# Altium PCB Lab7PCB.PcbDoc
Units mil, origin at the board's own origin, x right, y up, seen from the top; angles counter-clockwise.
Board outline 6000 x 4000 mil, 2 copper layers (Top Layer, Bottom Layer); 23 components, 17 nets, 51 pads, 0 vias.
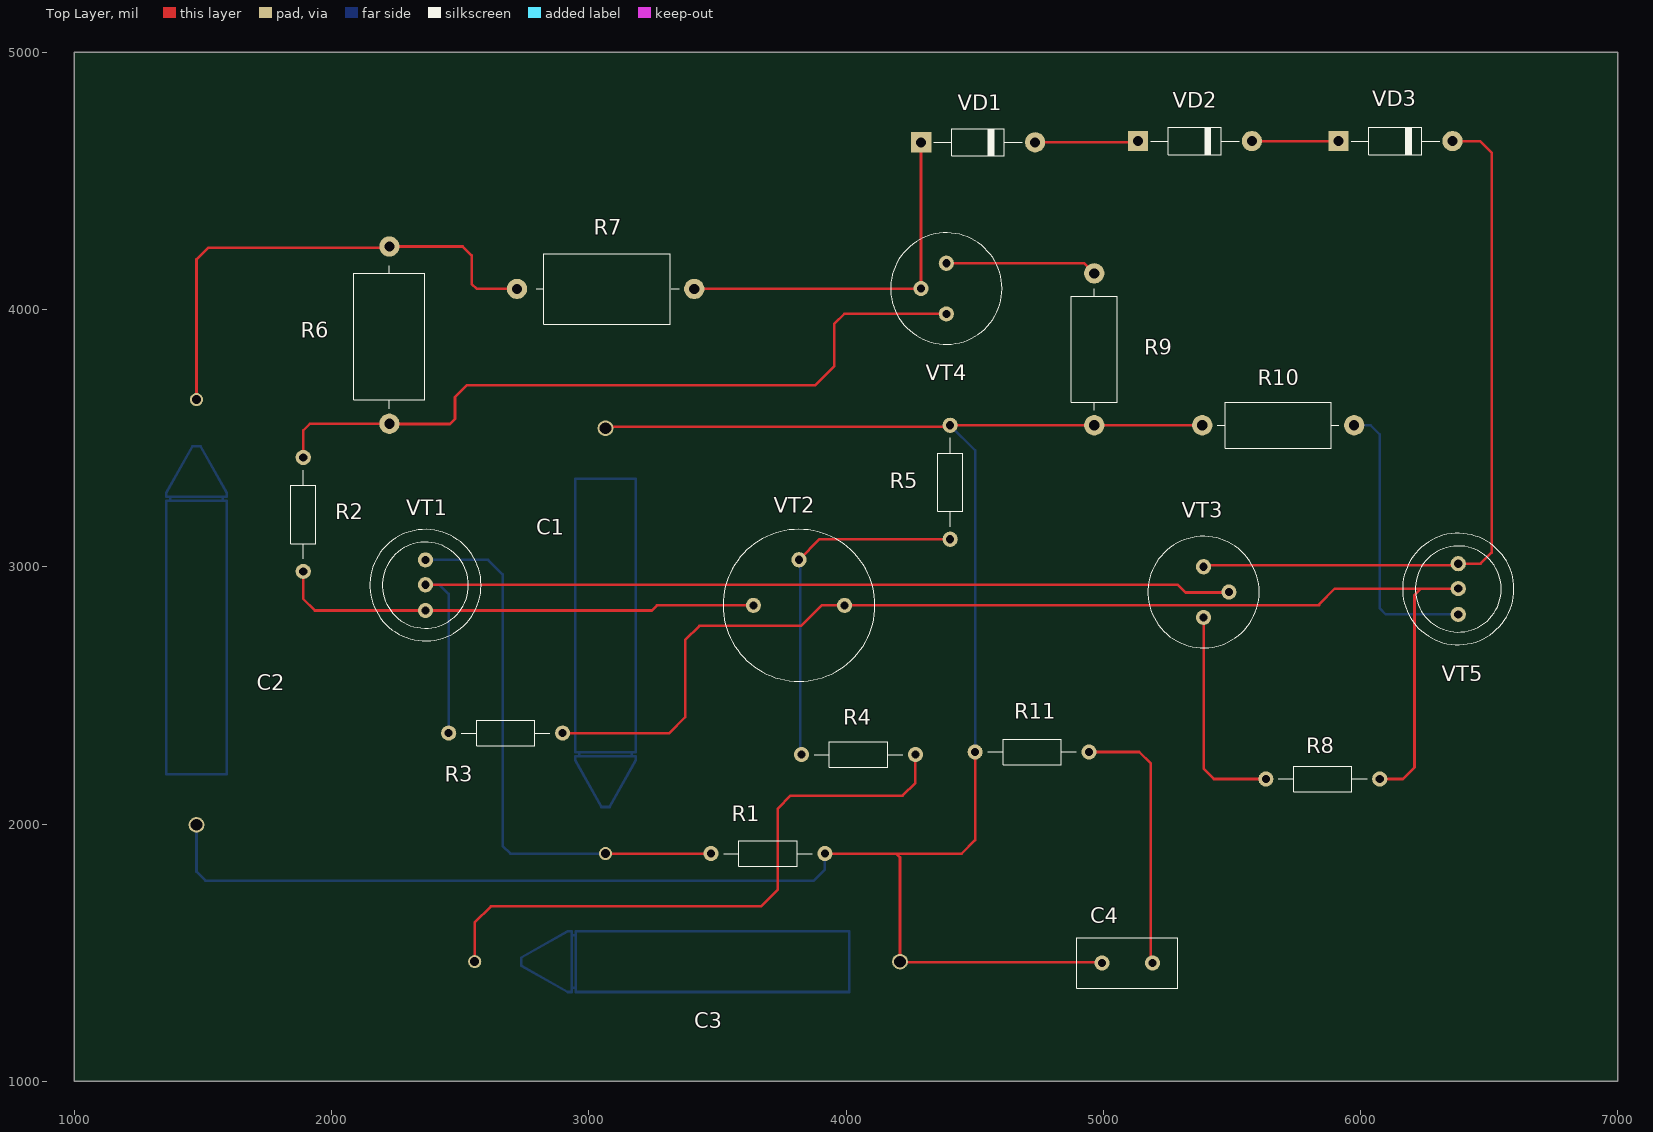
[diagram p0: Top Layer view]
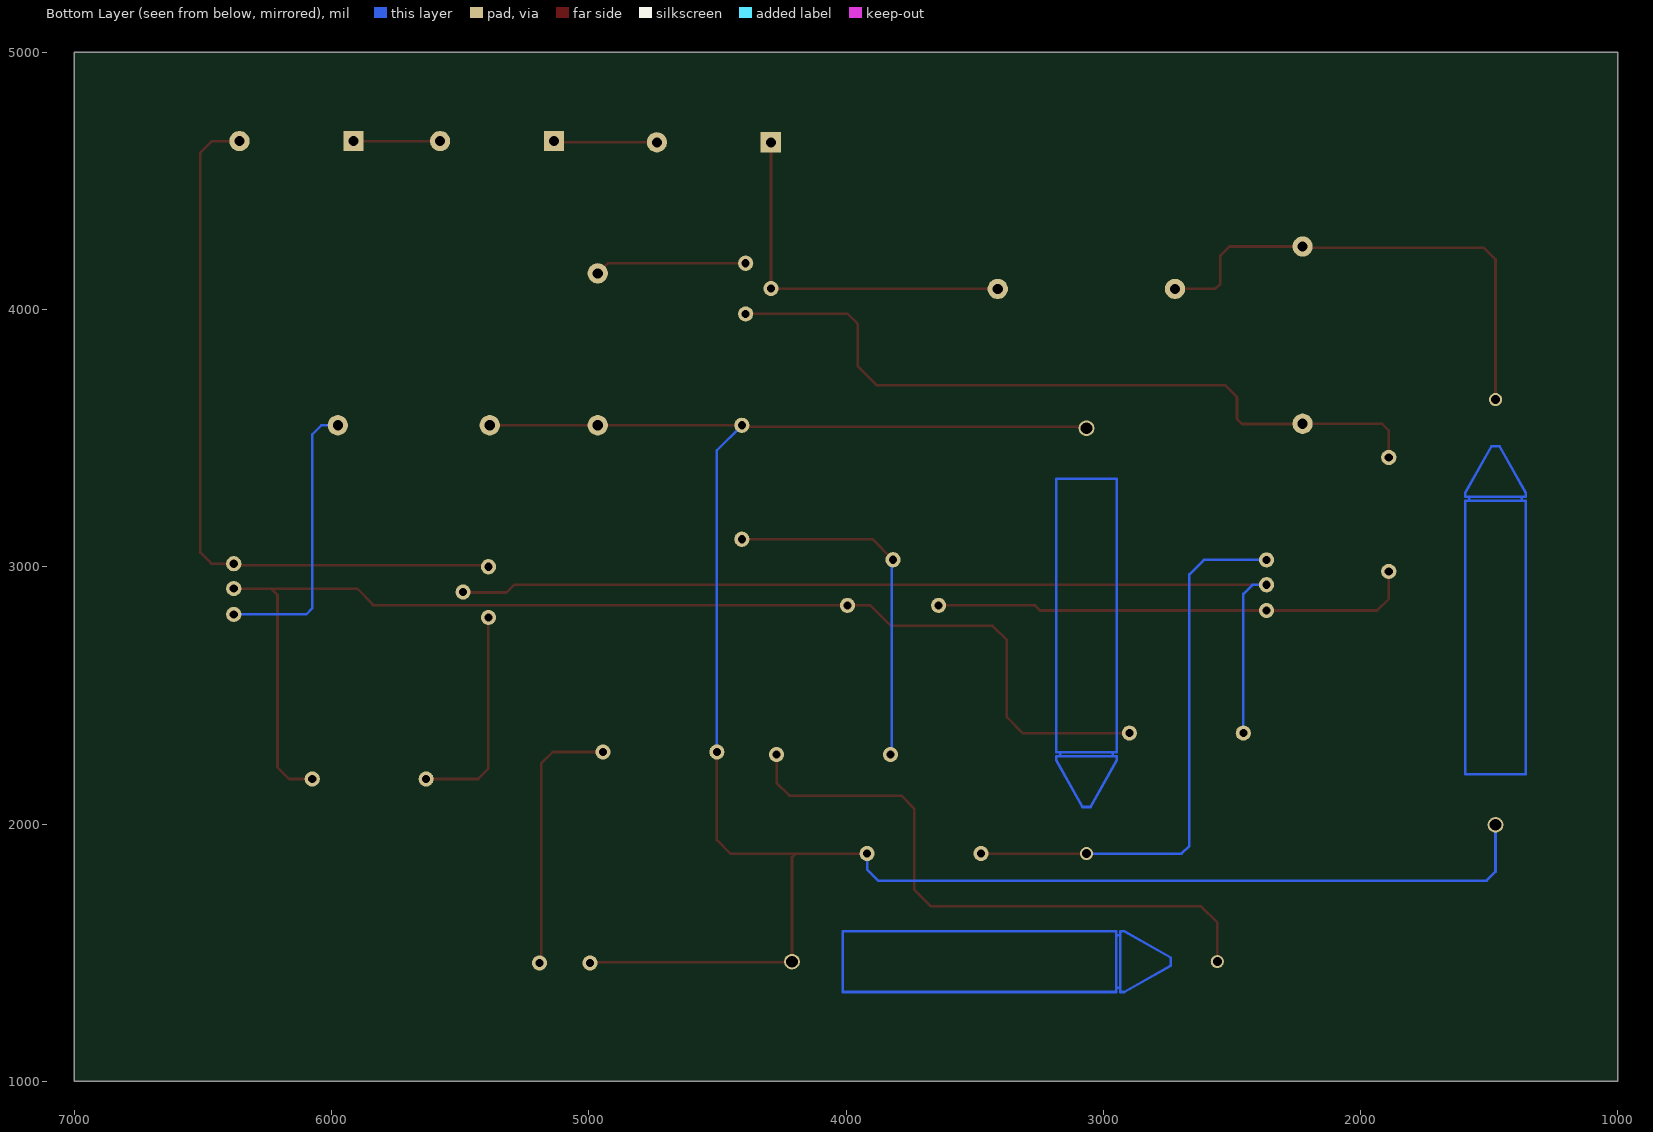
[diagram p1: Bottom Layer view, seen from below]

## Layer stack, top to bottom
Top Solder: solder mask 0.4, Solder Resist, Dk 3.5
Top Layer: signal copper 1.4
Dielectric 1: dielectric 12.6, FR-4, Dk 4.8
Bottom Layer: signal copper 1.4
Bottom Solder: solder mask 0.4, Solder Resist, Dk 3.5

## Board outline
1000,1000 7000,1000 7000,5000 1000,5000

## Design rules (kind name [scope] priority, off if disabled: settings)
Clearance [All] p1: gap=10 ignorepadtopadclearanceinfootprint=FALSE
PolygonConnect [All] p1: connectstyle=Relief reliefconductorwidth=10 reliefentries=4 polygonreliefangle="90 Angle" airgapwidth=10
RoutingVias [All] p1: holewidth=28 width=50 viastyle="Through Hole" minholewidth=28 minwidth=50 maxholewidth=28 maxwidth=50
SolderMaskExpansion [All] p1: expansion=4 istentingtop=FALSE
SupplyNets "Schematic Supply Nets_2" [InNet('+45')] p1: voltage=0.000
SupplyNets "Schematic Supply Nets_1" [InNet('-45')] p2: voltage=0.000
SupplyNets "Schematic Supply Nets" [InNet('GND')] p3: voltage=0.000
Width [All] p1: maxlimit=10 minlimit=10 preferedwidth=10
30 further rules are at their usual default settings.

## Classes and differential pairs
component class Sheet1: C1 C3 C4 R1 R2 R3 R4 R5 R6 R7 R8 R9 R10 R11 VD1 VD2 VD3 VT1 VT3 VT4 VT5

## Components (designator, comment, footprint, x,y, rotation, side; value= is the part's Value field where it differs from the comment)
C1 "10mkFx25B" K50_29 3065,3538.54 r270 top
C2 "10mkFx63B" K50_29 1475,1996.46 r90 top
C3 "K50_29" K50_29 4210,1465 r180 top
C4 "0,1" �10-17�-4 5191.85,1460 r180 top
R1 "27k" C2-33H-0.125W 3475,1885 r0 top
R2 "22k" C2-33H-0.125W 1890,3425 r270 top
R3 "1,5k" C2-33H-0.125W 2455.45,2353.36 r0 top
R4 "220" C2-33H-0.125W 4270,2270 r180 top
R5 "22k" C2-33H-0.125W 4405,3107.09 r90 top
R6 "3,3k" C2-33H-1W_17.5MM 2225,4245 r270 top
R7 "3,3k" C2-33H-1W_17.5MM 2721.02,4080 r0 top
R8 "33" C2-33H-0.125W 5632.09,2175 r0 top
R9 "0,33" C2-33H-0.5W_15MM 4965,4140.55 r270 top
R10 "0,33" C2-33H-0.5W_15MM 5385,3550 r0 top
R11 "10" C2-33H-0.125W 4502.09,2280 r0 top
VD1 "1N4007" DO-41(DO-204AL)_1N4007(Primary) 4292.09,4650 r180 top
VD2 "1N4007" DO-41(DO-204AL)_1N4007(Primary) 5135,4655 r180 top
VD3 "1N4007" DO-41(DO-204AL)_1N4007(Primary) 5915,4655 r180 top
VT1 "BC558" ��320� 2365,2830 r180 top
VT2 "BC558" 2T602A 3817.17,3027.17 r90 top
VT3 "TIP41" ��101 5390,2803.15 r180 top
VT4 "TIP142" ��101 4390,4180 r0 top
VT5 "TIP147" ��320� 6380,2815 r180 top

## Footprints (in the part's own frame and the unit in brackets; to place one, negate y for a bottom-side part, rotate by r counter-clockwise, add the part's x,y. Pads: shape width x height; smd on the part's side, far side on the other; paste and mask are expansions set on the pad)
2T602A [mm]
  round 1.5 hole 0.8: 1(-4.5,-4.5) 2(0,0) 3(-4.5,4.5)
  silkscreen extent -12,-7.5 3,7.5
C2-33H-0.5W_15MM [mm]
  round 2 hole 1: 1(0,0) 2(15,0)
  silkscreen extent 1.5,-2.25 13.5,2.25
C2-33H-0.125W [mm]
  round 1.5 hole 0.8: 1(0,0) 2(11.25,0)
  silkscreen extent 1.25,-1.25 10,1.25
C2-33H-1W_17.5MM [mm]
  round 2 hole 1: 1(0,0) 2(17.5,0)
  silkscreen extent 1.9,-3.5 16,3.5
DO-41(DO-204AL)_1N4007(Primary) [mm]
  rect 2x2 hole 1: A(0,0)
  round 2 hole 1: K(-11.25,0)
  silkscreen extent -10,-1.35 -1.25,1.35
K50_29 [mm]
  round 1.55 hole 1.15 unplated: 1(0,0)
  round 1.3 hole 0.9 unplated: 2(42,0)
  Bottom Layer lines w0.254: 32.4,-2.6 32,-2.6 ; 32.4,2.6 32,2.6 ; 32.8,-3 37.4,-0.4 37.4,0.4 32.8,3 32.4,3 32.4,-3 32.8,-3 ; 32,-3 5,-3 5,3 32,3 32,-3
�10-17�-4 [mm]
  round 1.5 hole 0.8: 1(0,0) 2(5,0)
  silkscreen extent -2.5,-2.5 7.5,2.5
��101 [mm]
  round 1.5 hole 0.8: 1(0,0) 2(-2.5,-2.5) 3(0,-5)
  silkscreen extent -5.5,-8 5.5,3
��320� [mm]
  round 1.5 hole 0.8: 1(0,0) 2(0,-2.54) 3(0,-5)
  silkscreen extent -5.5,-8 5.5,3

## Part data
C1 C2: library part K50_29
C4: library part �10-17�-�1500-18��
R1 R2 R3 R4 R5 R8 R11: library part "�2-23-0,125 ��"
R6 R7: library part C2-33H-1W_OLD_UGO, Autor=pcbdesigner.ru
R9 R10: library part C2-33H-0.5W_OLD_UGO, Autor=pcbdesigner.ru
VT1 VT5: library part 1�320�_1
VT2: library part TRANSISTOR_(1111)
VT3 VT4: library part ��101

## Nets (pads, with @x,y where several pads share a name; then routed paths per layer and width w, separated by ;. In a path a pad name is that pad's centre, name@x,y a point inside that pad or via, vN(x,y) a via of type N, cw(c..) or ccw(c..) an arc to the next point about the centre after c; other vN are vias at no path point)
+45: R2.1 R6.2 VT4.3 | length 2940
  Top Layer w10: R2.1 1890,3530 1916.02,3556.02 R6.2 2226.02,3555 2460,3555 2480,3575 2480,3660 2525,3705 3880,3705 3955,3780 3955,3945 3993.15,3983.15 VT4.3
-45: R3.2 R8.2 VT2.1 VT5.2 | length 4751.9
  Top Layer w10: R3.2 3313.36,2353.36 3375,2415 3375,2715 3430,2770 3825,2770 3905,2850 VT2.1 5840,2850 5840,2855 5900,2915 VT5.2 ; R8.2 6165,2175 6210,2220 6210,2890 6235,2915
GND: C1.1 C2.1 C3.1 C4.2 R1.2 R5.2 R9.2 R10.1 R11.1 | length 8515.6
  Top Layer w10: C1.1 3070.73,3544.27 4399.27,3544.27 R5.2 R9.2 R10.1 ; R1.2 4195,1885 ; R11.1 4502.09,1937.09 4450,1885 4195,1885 ; C4.2 4992.5,1462.5 4212.5,1462.5 C3.1 4210,1870 4195,1885
  Bottom Layer w10: C2.1 1475,1815 1510,1780 3875,1780 3917.91,1822.91 R1.2 ; R5.2 4502.09,3452.91 R11.1
NetC1_2: C1.2 R1.1 VT1.3 | length 2201
  Top Layer w10: C1.2 R1.1
  Bottom Layer w10: VT1.3 2608.15,3026.85 2665,2970 2665,1915 2695,1885 C1.2
NetC2_2: C2.2 R6.1 R7.1 | length 1944.5
  Top Layer w10: C2.2 1475,4195 1520,4240 2220,4240 R6.1 2510,4245 2545,4210 2545,4100 2565,4080 R7.1
NetC3_2: C3.2 R4.1 | length 2384.7
  Top Layer w10: C3.2 2556.46,1616.46 2620,1680 3670,1680 3735,1745 3735,2060 3785,2110 4220,2110 4270,2160 R4.1
NetC4_1: C4.1 R11.2 | length 1036.5
  Top Layer w10: R11.2 5140,2280 5185,2235 5185,1466.85 C4.1
NetR2_2: R2.2 VT1.1 VT2.3 | length 1884
  Top Layer w10: R2.2 1890,2875 1935,2830 VT1.1 3245,2830 3265,2850 VT2.3
NetR3_1: R3.1 VT1.2 VT3.2 | length 3782.8
  Top Layer w10: VT1.2 5290,2930 5320,2900 5486.85,2900 VT3.2
  Bottom Layer w10: VT1.2 2420,2930 2455.45,2894.55 R3.1
NetR4_2: R4.2 R5.1 VT2.2 | length 1382.2
  Top Layer w10: VT2.2 3897.09,3107.09 R5.1
  Bottom Layer w10: VT2.2 3822.13,3022.2 3822.13,2274.96 R4.2
NetR7_2: R7.2 VD1.A VT4.2 | length 1450.9
  Top Layer w10: R7.2 3410.79,4080.79 4290.79,4080.79 VT4.2 4291.57,4649.49 VD1.A
NetR8_1: R8.1 VT3.1 | length 846.8
  Top Layer w10: VT3.1 5390,2215 5430,2175 R8.1
NetR9_1: R9.1 VT4.1 | length 591.3
  Top Layer w10: VT4.1 4925.55,4180 R9.1
NetR10_2: R10.2 VT5.1 | length 1106
  Bottom Layer w10: R10.2 6040,3550 6075,3515 6075,2840 6074.14,2839.14 6098.28,2815 VT5.1
NetVD1_K: VD1.K VD2.A | length 402.1
  Top Layer w10: VD1.K 5130,4650 VD2.A
NetVD2_K: VD2.K VD3.A | length 337.1
  Top Layer w10: VD2.K VD3.A
NetVD3_K: VD3.K VT3.3 VT5.3 | length 2868.5
  Top Layer w10: VT3.3 5395.93,3005.93 6374.07,3005.93 VT5.3 6466.85,3011.85 6510,3055 6510,4610 6465,4655 VD3.K